# EAGLE board P27 (EAGLE 6.4)
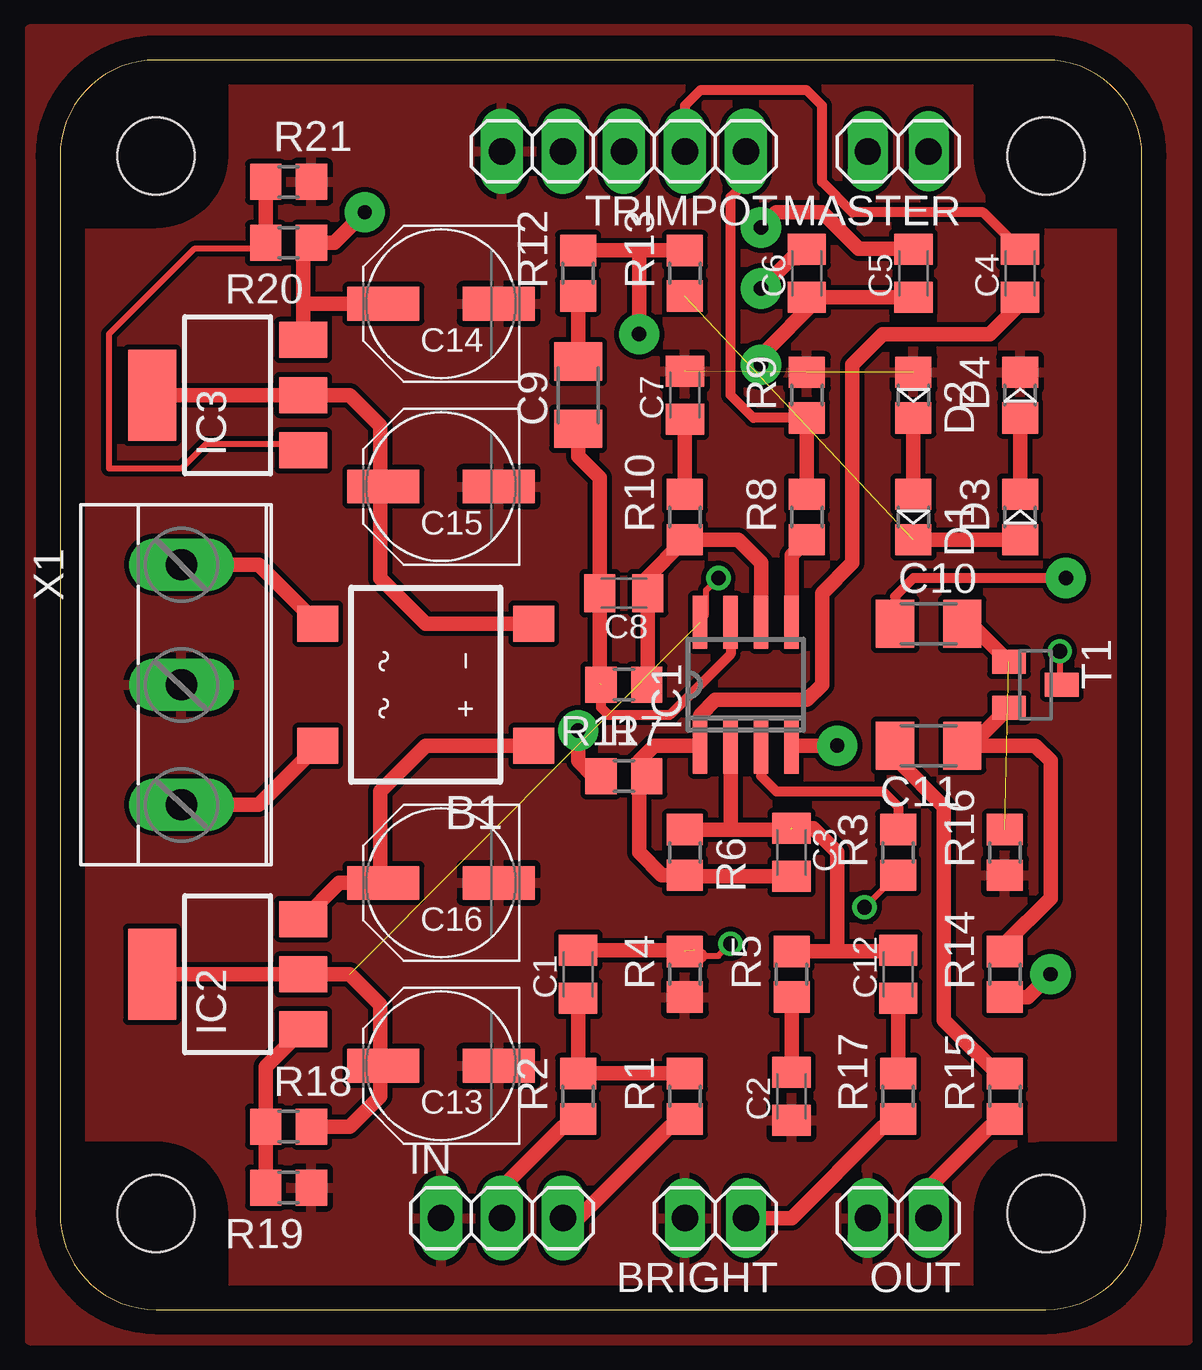
[diagram p0: board, top side]
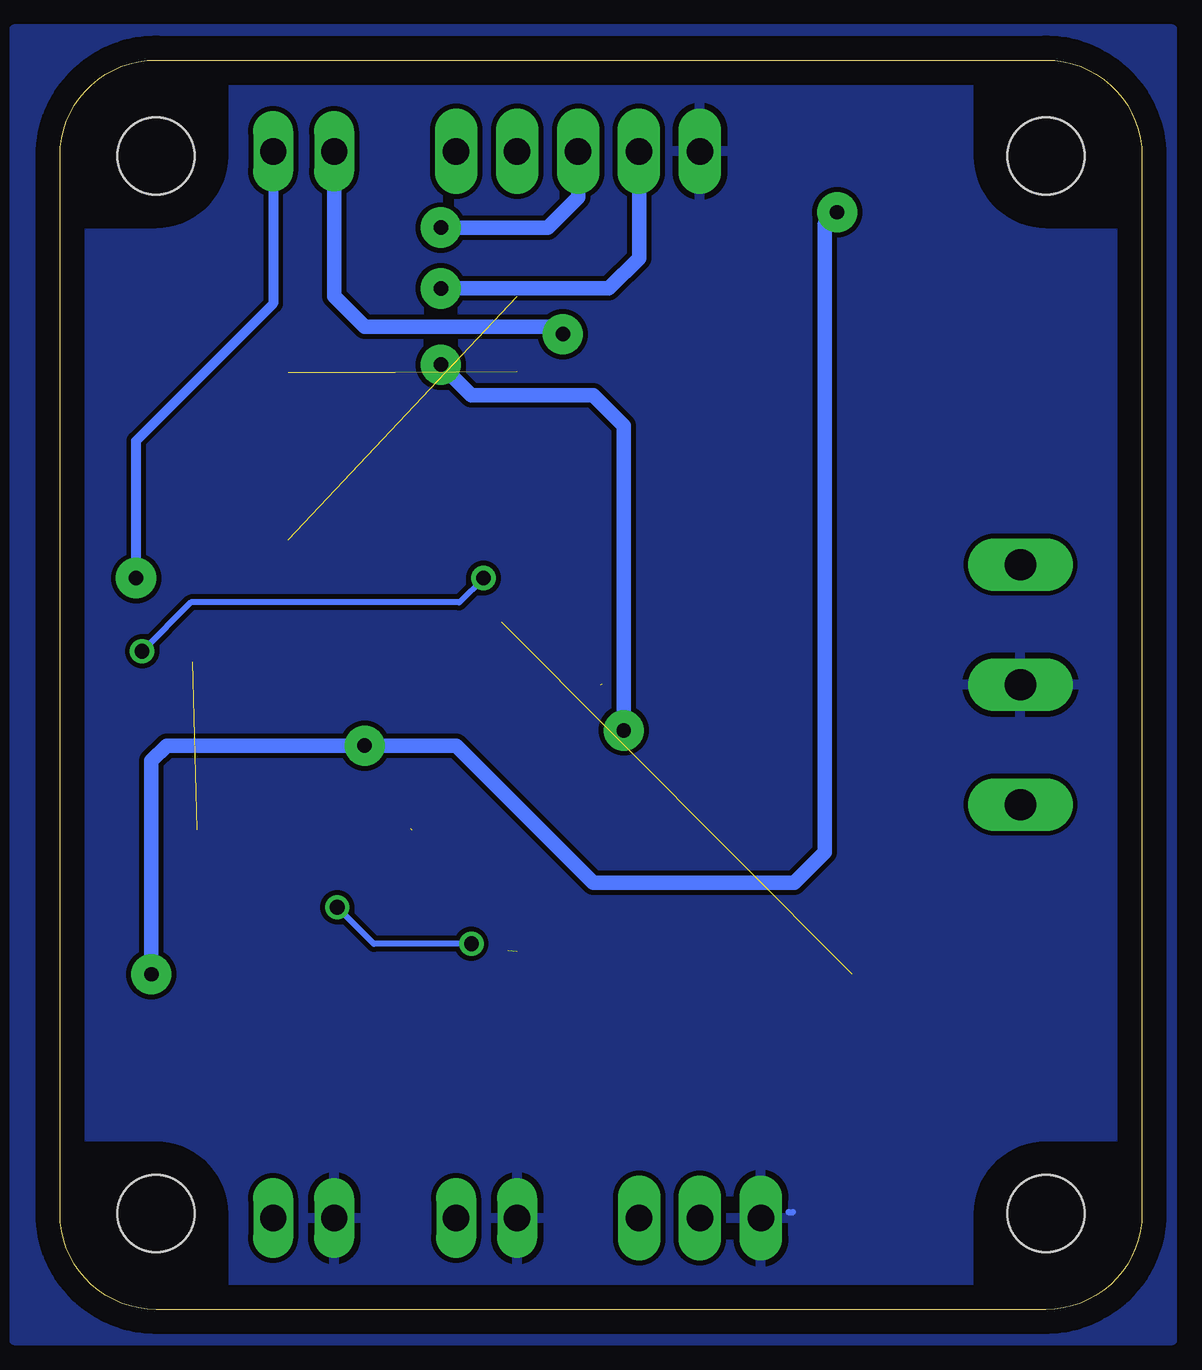
[diagram p1: board, bottom side, seen from below]

Size 45.08 x 52.06 mm. Coordinates in mm from the lower left corner, seen from the top.
Outline: 4,0 41.08,0 arc90 45.08,4 45.08,48.06 arc90 41.08,52.06 4,52.06 arc90 0,48.06 0,4 arc90 4,0
Copper layers (1*16): Top 0.035mm / dielectric 1.5mm / Bottom 0.035mm
Design rules "default": minimum track width 10mil, minimum drill 24mil, track to track 8mil, track to pad 8mil, pad to pad 8mil, via to via 8mil, smd to smd 8mil, copper to edge 40mil, drill to drill 8mil, minimum pad ring 10mil, minimum via ring 8mil, stop-mask expansion 4mil, vias tented up to drill 0mil, thermal gap 10mil
Holes 3.2 mm at 4,4 41.08,4 41.08,48.06 4,48.06
tKeepout: 8 lines
bKeepout: 6 lines
tRestrict: area 0,45.1 to 7,52.1; area 0,0 to 7,7; area 38.1,0 to 45.1,7; area 38.1,45.1 to 45.1,52.1
bRestrict: area 0,45.1 to 7,52.1; area 0,0 to 7,7; area 38.1,0 to 45.1,7; area 38.1,45.1 to 45.1,52.1
vRestrict: area 0,45.1 to 7,52.1; area 0,0 to 7,7; area 38.1,0 to 45.1,7; area 38.1,45.1 to 45.1,52.1

## Footprints (pad centres in the part's own frame; a part is rotated, then mirrored left to right if it is on the bottom)
DFS = smd 1.5 x 1.7: + -2.55,-4.5; - 2.55,-4.5; AC1 -2.55,4.5; AC2 2.55,4.5
1X02 = drill 1.1 pad 1.676 long: 1 -1.27,0; 2 1.27,0
C0805K = smd 1.3 x 1.6: 1 -1,0; 2 1,0
C1206 = smd 1.6 x 2: 1 -1.4,0; 2 1.4,0
PANASONIC_D = smd 3 x 1.4: + 2.4,0; - -2.4,0
D0805 = smd 1.3 x 1.5: A -0.95,0; K 0.95,0
SO08 = smd 0.6 x 2.2: 1 -1.905,-2.6; 2 -0.635,-2.6; 3 0.635,-2.6; 4 1.905,-2.6; 5 1.905,2.6; 6 0.635,2.6; 7 -0.635,2.6; 8 -1.905,2.6
SOT223 = smd 1.5 x 2: 1 -2.3,-3.15; 2 0,-3.15; 3 2.3,-3.15 | smd 3.8 x 2: 4 0,3.15
1X03 = drill 1.1 pad 1.778 long: 1 -2.54,0; 2 0,0; 3 2.54,0
R0805 = smd 1.3 x 1.5: 1 -0.95,0; 2 0.95,0
SOT23 = smd 1 x 1.4: 1 -0.95,-1.1; 2 0.95,-1.1; 3 0,1.1
1X05 = drill 1.1 pad 1.778 long: 1 -5.08,0; 2 -2.54,0; 3 0,0; 4 2.54,0; 5 5.08,0
W237-103 = drill 1.3 pad 2.184 long: 1 -5,-1.29; 2 0,-1.29; 3 5,-1.29

## Placement (x,y rotation side)
B1  DF01S  [DFS]  15.24,26.04 90 top
BRIGHT  [1X02]  27.3,3.81 180 top
C1  47nF  [C0805K]  21.59,13.97 90 top
C2  1uF  [C0805K]  30.48,8.89 90 top
C3  120pF  [C0805K]  30.48,19.05 270 top
C4  1nF  [C0805K]  40.01,43.18 90 top
C5  220nF  [C0805K]  35.56,43.18 90 top
C6  100nF  [C0805K]  31.11,43.18 90 top
C7  1uF  [C0805K]  26.04,38.1 90 top
C8  120pF  [C0805K]  23.5,29.84 180 top
C9  2.2uF  [C1206]  21.59,38.1 90 top
C10  2.2uF  [C1206]  36.2,28.57 0 top
C11  10uF  [C1206]  36.2,23.5 180 top
C12  22nF  [C0805K]  34.92,13.97 90 top
C13  [PANASONIC_D]  15.88,10.16 180 top
C14  [PANASONIC_D]  15.88,41.91 180 top
C15  [PANASONIC_D]  15.88,34.29 180 top
C16  [PANASONIC_D]  15.88,17.78 180 top
D1  1N4148  [D0805]  35.56,33.02 270 top
D2  1N4148  [D0805]  35.56,38.1 270 top
D3  1N4148  [D0805]  40.01,33.02 90 top
D4  1N4148  [D0805]  40.01,38.1 90 top
IC1  NE5532U  [SO08]  28.57,26.04 0 top
IC2  LM317  [SOT223]  6.99,13.97 90 top
IC3  LM337  [SOT223]  6.99,38.1 90 top
IN  [1X03]  18.41,3.81 0 top
MASTER  [1X02]  34.92,48.26 180 top
OUT  [1X02]  34.92,3.81 180 top
R1  22k  [R0805]  26.04,8.89 90 top
R2  100k  [R0805]  21.59,8.89 90 top
R3  2k2  [R0805]  34.92,19.05 90 top
R4  1M  [R0805]  26.04,13.97 90 top
R5  4k7  [R0805]  30.48,13.97 90 top
R6  68k  [R0805]  26.04,19.05 270 top
R7  33k  [R0805]  23.5,22.23 0 top
R8  2k2  [R0805]  31.11,33.02 90 top
R9  1M  [R0805]  31.11,38.1 90 top
R10  4k7  [R0805]  26.04,33.02 90 top
R11  68k  [R0805]  23.5,26.04 180 top
R12  4k7  [R0805]  21.59,43.18 90 top
R13  220  [R0805]  26.04,43.18 90 top
R14  2k2  [R0805]  39.37,13.97 90 top
R15  100  [R0805]  39.37,8.89 90 top
R16  100k  [R0805]  39.37,19.05 90 top
R17  1k  [R0805]  34.92,8.89 90 top
R18  2k  [R0805]  9.53,7.62 0 top
R19  240  [R0805]  9.53,5.08 180 top
R20  2k  [R0805]  9.53,44.45 180 top
R21  240  [R0805]  9.53,46.99 0 top
T1  BC549  [SOT23]  40.64,26.04 270 top
TRIMPOT  [1X05]  23.5,48.26 180 top
X1  [W237-103]  6.35,26.04 270 top

## Library data of the parts
B1 BRIGHT C1-C16 D1-D4 IC1-IC3 IN MASTER OUT R1-R21 T1 TRIMPOT X1 = P27

## Nets
+12V: C13.+ IC1.8 IC2.2 IC2.4 R18.2 T1.3
-12V: C14.+ IC1.4 IC3.3 R14.1 R20.1
AGND: BRIGHT.2 C2.1 C7.2 C13.- C14.- C15.- C16.- D2.A D4.K IN.1 OUT.2 R4.1 R9.2 R16.1 R19.1 R21.2 TRIMPOT.5 X1.2
N$1: C1.1 R1.2 R2.2
N$2: IC1.3 R3.2
N$3: C1.2 R3.1 R4.2
N$4: C3.1 C12.2 IC1.2 R5.2 R6.1
N$5: C2.2 R5.1
N$6: C3.2 C4.1 IC1.1 R6.2 R7.2
N$7: C6.2 TRIMPOT.4
N$8: C5.1 C6.1 R7.1
N$9: C5.2 TRIMPOT.3
N$10: C4.2 TRIMPOT.2
N$11: C10.2 R16.2 T1.1
N$12: C7.1 R10.2
N$13: R8.2 R9.1 TRIMPOT.1
N$14: IC1.5 R8.1
N$15: C11.1 R14.2 T1.2
N$16: C11.2 R15.2
N$17: C8.1 IC1.6 R10.1 R11.1
N$18: C8.2 C9.1 IC1.7 R11.2
N$19: OUT.1 R15.1
N$20: C9.2 R12.1
N$21: MASTER.2 R12.2 R13.2
N$22: D1.A D2.K
N$23: D3.K D4.A
N$24: D1.K D3.A R13.1
N$25: IN.3 R1.1
N$26: IN.2 R2.1
N$27: C10.1 MASTER.1
N$28: B1.AC1 X1.3
N$29: C12.1 R17.2
N$30: BRIGHT.1 R17.1
N$31: B1.AC2 X1.1
N$32: B1.+ C16.+ IC2.3
N$33: B1.- C15.+ IC3.2 IC3.4
N$34: IC2.1 R18.1 R19.2
N$38: IC3.1 R20.2 R21.1

## Tracks (layer width: path | path; a pad name or v marks a point on that pad's centre or on a via)
+12V  (via drill 0.61)  (1 unrouted)
  Top 0.254: v41.66,27.43 41.66,26.42 T1.3 | v27.43,30.48 26.92,29.97 26.92,28.96 IC1.8 | 13.21,10.16 C13.+ | 10.16,14.22 IC2.2
  Top 0.61: IC2.4 IC2.2 12.06,13.97 13.34,12.7 13.34,10.3 C13.+ 13.34,10.02 13.34,8.89 12.06,7.62 R18.2
  Bottom 0.254: v41.66,27.43 39.62,29.46 28.45,29.46 v27.43,30.48
-12V  (via drill 0.6 pad 1.68)
  Top 0.254: 30.48,23.37 IC1.4 | 13.21,41.66 C14.+
  Top 0.61: IC3.3 10.13,41.91 | 10.13,41.91 10.13,44.11 R20.1 11.43,44.45 v12.7,45.72 | 13.21,41.66 12.95,41.66 12.7,41.91 10.13,41.91 | R14.1 40.33,13.02 v41.27,13.97 | v32.38,23.5 30.54,23.5 IC1.4
  Bottom 0.61: v12.7,45.72 13.21,45.21 13.21,19.05 14.48,17.78 22.86,17.78 28.57,23.5 v32.38,23.5 40.64,23.5 41.27,22.86 v41.27,13.97
AGND  (2 unrouted)
  Bottom 0.254: 14.73,4.06 14.53,4.06
  pour Top: -1.27,53.34 -1.27,-1.27 46.99,-1.27 46.99,53.34
  pour Bottom: -1.27,-1.27 -1.27,53.34 46.99,53.34 46.99,-1.27
N$1
  Top 0.61: R1.2 R2.2 C1.1
N$2
  Top 0.406: IC1.3 29.21,22.23 29.84,21.59 34.29,21.59 34.92,20.95 R3.2
N$3  (via drill 0.61)  (1 unrouted)
  Top 0.254: v33.53,16.76 34.54,17.78 R3.1 | v27.94,15.24 27.43,14.73 26.67,14.73 26.42,14.73
  Top 0.61: C1.2 26.43,14.97 26.67,14.73
  Bottom 0.254: v33.53,16.76 32,15.24 v27.94,15.24
N$4  (1 unrouted)
  Top 0.254: 30.48,14.73 R5.2 | 34.54,14.73 C12.2
  Top 0.61: IC1.2 27.94,20 | R6.1 27.94,20 | 27.94,20 30.43,20 | C3.1 31.39,20.05 32.38,19.05 32.38,14.92 | R5.2 32.38,14.92 | 32.38,14.92 34.88,14.92 C12.2
N$5
  Top 0.61: C2.2 R5.1
N$6
  Top 0.406: 24.13,21.91 R7.2 24.13,22.23 | 26.61,23.5 IC1.1
  Top 0.61: C3.2 26.09,18.05 R6.2 25.08,18.1 24.13,19.05 24.13,21.91 | 24.13,22.23 24.13,22.86 24.77,23.5 26.61,23.5 26.67,23.55 26.67,24.77 27.3,25.4 31.11,25.4 31.75,26.04 31.75,29.84 33.02,31.11 33.02,39.37 34.29,40.64 38.73,40.64 40.01,41.91 C4.1
N$7  (via drill 0.6 pad 1.68)
  Top 0.254: 30.99,44.2 C6.2
  Top 0.61: v29.21,42.55 30.48,43.81 30.75,43.81 C6.2
  Bottom 0.61: v29.21,42.55 22.23,42.55 20.95,43.81 TRIMPOT.4
N$8  (via drill 0.6 pad 1.68)
  Top 0.406: R7.1 22.23,22.23
  Top 0.61: C5.1 C6.1 31.62,42.16 29.21,39.75 v29.21,39.37 | 22.23,22.23 21.59,22.86 v21.59,24.13
  Bottom 0.61: v21.59,24.13 21.59,36.83 22.86,38.1 27.94,38.1 v29.21,39.37
N$9  (via drill 0.6 pad 1.68)
  Top 0.254: 35.56,44.2 C5.2
  Top 0.61: 35.56,44.2 33.27,44.2 31.75,45.72 29.84,45.72 v29.21,45.09
  Bottom 0.61: v29.21,45.09 24.77,45.09 23.5,46.35 TRIMPOT.3
N$10
  Top 0.406: TRIMPOT.2 26.04,50.16 26.67,50.8 31.11,50.8 31.75,50.16 31.75,46.99 33.02,45.72 38.47,45.72 C4.2
N$11  (1 unrouted)
  Top 0.61: C10.2 37.95,28.57 T1.1
N$12
  Top 0.61: R10.2 C7.1
N$13
  Top 0.406: R9.1 28.89,37.15 27.94,38.1 27.94,46.35 28.57,46.99 TRIMPOT.1
  Top 0.61: R8.2 R9.1
N$14
  Top 0.61: IC1.5 30.48,31.43 R8.1
N$15
  Top 0.61: C11.1 37.95,23.5 | 37.95,23.5 T1.2 | 37.95,23.5 40.64,23.5 41.27,22.86 41.27,17.14 39.37,15.24 R14.2
N$16
  Top 0.61: R15.2 39.37,9.53 36.83,12.06 36.83,20.95 34.92,22.86 34.92,23.36 C11.2
N$17
  Top 0.254: 25.91,32 R10.1
  Top 0.61: R11.1 24.5,26.09 C8.1 24.38,29.96 24.38,30.42 R10.1 28.25,32.07 29.21,31.11 IC1.6
N$18  (1 unrouted)
  Top 0.406: IC1.7 27.94,27.3 25.4,24.77 22.86,24.77 22.55,25.08 R11.2
  Top 0.61: C9.1 21.59,35.56 22.5,34.66 C8.2 22.5,26.09
N$19
  Top 0.61: OUT.1 36.2,5.08 38.73,7.62 39.05,7.62 R15.1
N$20
  Top 0.61: C9.2 R12.1
N$21  (via drill 0.6 pad 1.68)
  Top 0.61: v24.13,40.64 24.13,44.13 | R13.2 24.13,44.13 | 24.13,44.13 R12.2
  Bottom 0.61: MASTER.2 33.66,42.23 32.38,40.96 24.45,40.96 v24.13,40.64
N$22
  Top 0.61: D2.K D1.A
N$23
  Top 0.61: D4.A D3.K
N$24  (1 unrouted)
  Top 0.254: 39.62,32 D3.A
  Top 0.61: D1.K D3.A
N$25
  Top 0.61: IN.3 21.59,3.81 25.4,7.62 25.71,7.62 R1.1
N$26
  Top 0.61: IN.2 18.41,5.08 20.95,7.62 21.27,7.62 R2.1
N$27  (via drill 0.6 pad 1.68)
  Top 0.406: v41.91,30.48 35.56,30.48 34.8,29.71 C10.1
  Bottom 0.406: MASTER.1 36.2,41.91 41.91,36.2 v41.91,30.48
N$28
  Top 0.61: X1.3 8.29,21.04 B1.AC1
N$29
  Top 0.61: R17.2 C12.1
N$30
  Top 0.61: BRIGHT.1 30.48,3.81 34.29,7.62 34.6,7.62 R17.1
N$31
  Top 0.61: X1.1 8.29,31.04 B1.AC2
N$32
  Top 0.61: B1.+ 15.23,23.48 13.34,21.59 13.34,17.92 C16.+ 11.64,17.78 IC2.3
N$33
  Top 0.61: IC3.4 IC3.2 12.06,38.1 13.34,36.83 13.34,34.43 C15.+ 13.34,34.15 13.34,30.48 15.23,28.59 B1.-
N$34
  Top 0.61: R19.2 R18.1 8.57,10.11 IC2.1
N$38
  Top 0.254: IC3.1 9.65,36.07 6.1,36.07 5.08,35.05 2.03,35.05 2.03,40.64 5.59,44.2 8.13,44.2 R20.2
  Top 0.61: R21.1 R20.2